# Altium PCB arduino-to-headers-shield.PcbDoc
Units mil, origin at the board's own origin, x right, y up, seen from the top; angles counter-clockwise.
Board outline 3900 x 2100 mil, 2 copper layers (Top Layer, Bottom Layer); 16 components, 30 nets, 89 pads, 2 vias.
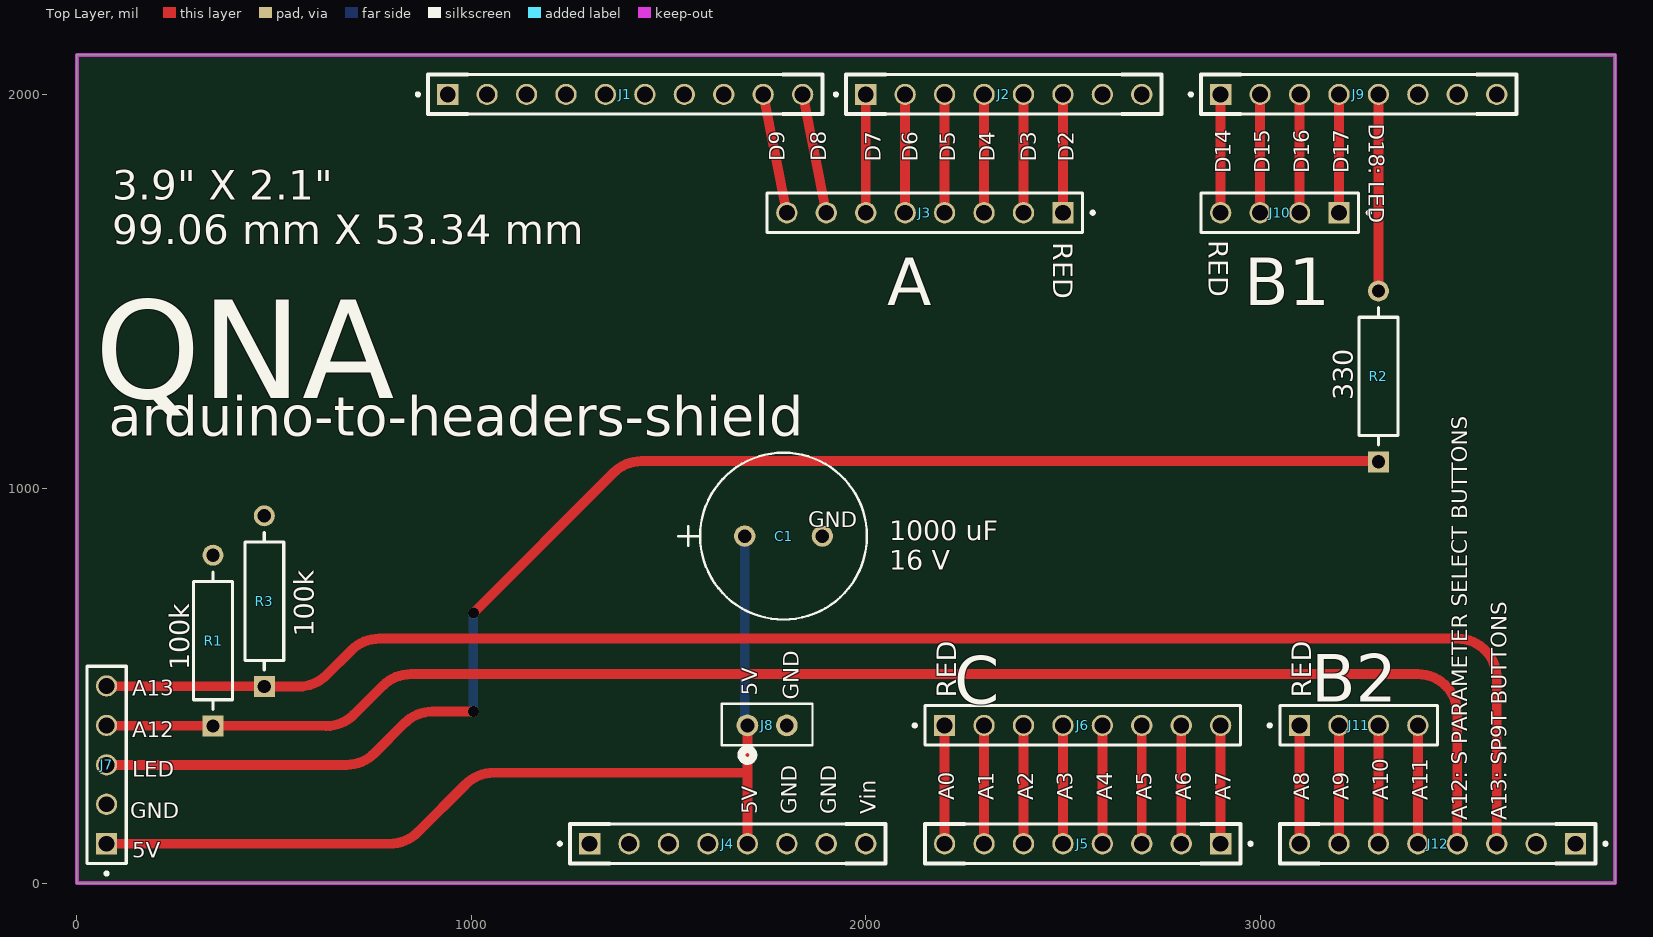
[diagram p0: Top Layer view]
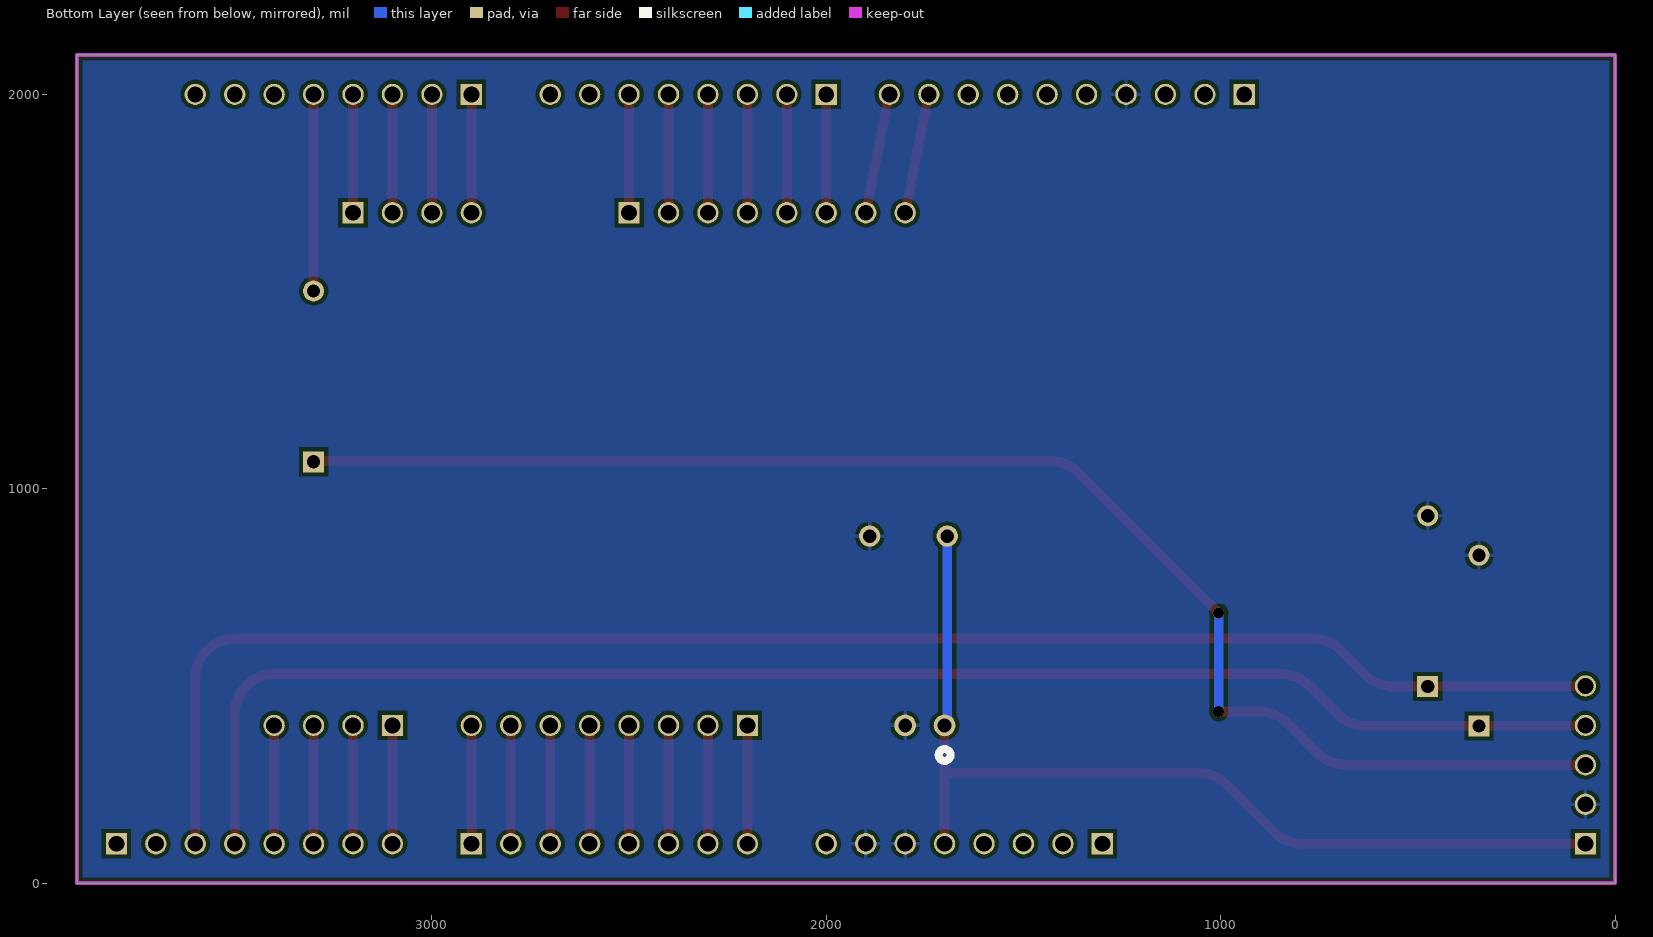
[diagram p1: Bottom Layer view, seen from below]
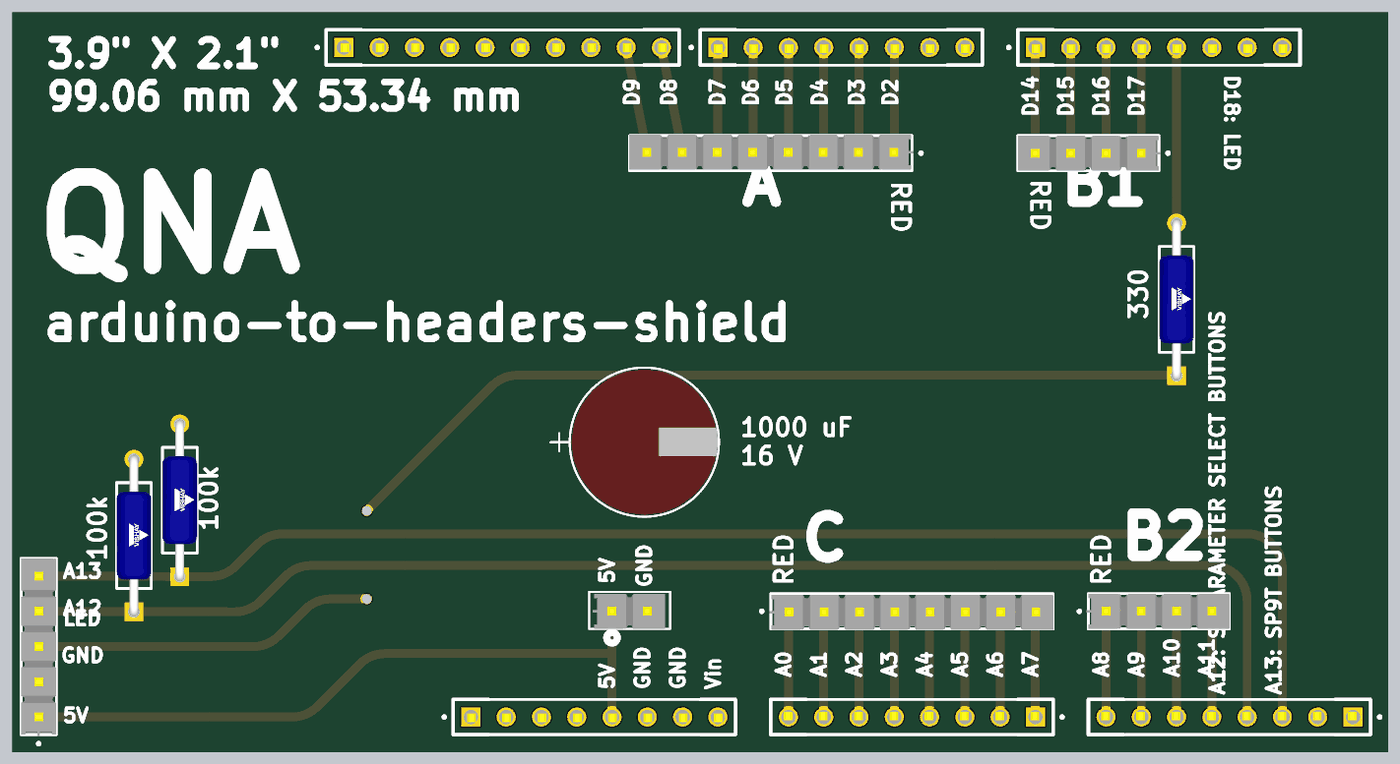
[diagram p2: 3D render of the assembled board from above, using the file's embedded part models]

## Layer stack, top to bottom
Top Solder: solder mask 0.4, Solder Resist, Dk 3.5
Top Layer: signal copper 1.4
Dielectric 1: dielectric 12.6, FR-4, Dk 4.8
Bottom Layer: signal copper 1.4
Bottom Solder: solder mask 0.4, Solder Resist, Dk 3.5

## Board outline
0,0 0,2100 3900,2100 3900,0

## Design rules (kind name [scope] priority, off if disabled: settings)
Clearance [All] p1: gap=10 ignorepadtopadclearanceinfootprint=FALSE except(0: Arc-Hole Track-Hole SMDPad-Hole THPad-Hole Via-Hole Fill-Hole Poly-Hole Region-Hole Text-Hole; 4: Arc-Arc Arc-Track Arc-SMDPad Track-Track Track-SMDPad SMDPad-SMDPad)
PolygonConnect [All] p1: connectstyle=Relief reliefconductorwidth=10 reliefentries=4 polygonreliefangle="90 Angle" airgapwidth=10
RoutingVias [All] p1: holewidth=28 width=50 viastyle="Through Hole" minholewidth=28 minwidth=50 maxholewidth=28 maxwidth=50
SolderMaskExpansion [All] p1: expansion=4 istentingtop=FALSE
Width [All] p1: maxlimit=35 minlimit=10 preferedwidth=25 minimp=50.000000 maximp=50.000000 favimp=50.000000
30 further rules are at their usual default settings.

## Components (designator, comment, footprint, x,y, rotation, side; value= is the part's Value field where it differs from the comment)
C1 "16PK1000MEFC10X12.5" CAP_PKPZ_10X12P5_LOW_RUB 1693.15,880 r0 top
J1 "TSW-110-07-G-S" SAMTEC_TSW-110-07-G-S 1390,2000 r0 top
J2 "TSW-108-07-G-S" SAMTEC_TSW-108-07-G-S 2350,2000 r0 top
J3 "TSW-108-07-G-S-topside" SAMTEC_TSW-108-07-G-S-topside 2150,1700 r180 top
J4 "TSW-108-07-G-S" SAMTEC_TSW-108-07-G-S 1650,100 r0 top
J5 "TSW-108-07-G-S" SAMTEC_TSW-108-07-G-S 2550,100 r180 top
J6 "TSW-108-07-G-S-topside" SAMTEC_TSW-108-07-G-S-topside 2550,400 r0 top
J7 "TSW-105-07-G-topside" SAMTEC_TSW-105-07-G-S-topside 75,300 r90 top
J8 "TSW-102-07-G-S" TSW-102-07-G-S-topside 1750,400 r0 top
J9 "TSW-108-07-G-S" SAMTEC_TSW-108-07-G-S 3250,2000 r0 top
J10 "TSW-104-07-G-S-topside" SAMTEC_TSW-104-07-G-S-topside 3050,1700 r180 top
J11 "TSW-104-07-G-S-topside" SAMTEC_TSW-104-07-G-S-topside 3250,400 r0 top
J12 "TSW-108-07-G-S" SAMTEC_TSW-108-07-G-S 3450,100 r180 top
R1 "100k" FP-RLR07-MFG 345,615 r90 top
R2 "330 ohm" FP-RLR07-MFG 3300,1285 r90 top
R3 "100k" FP-RLR07-MFG 475,715 r90 top

## Footprints (in the part's own frame and the unit in brackets; to place one, negate y for a bottom-side part, rotate by r counter-clockwise, add the part's x,y. Pads: shape width x height; smd on the part's side, far side on the other; paste and mask are expansions set on the pad)
CAP_PKPZ_10X12P5_LOW_RUB [mil]
  round 54 / inner round 60 / far side round 54 hole 34 paste-99999 mask+0: 1(0,0) 2(196.85,0)
  silkscreen extent -168,-212 310,212, body extent -108,-206 306,206, height 552
FP-RLR07-MFG [mm]
  rect 1.35x1.35 hole 0.85 paste-2539.97 mask+0: 1(-5.5,0)
  round 1.35 hole 0.85 paste-2539.97 mask+0: 2(5.5,0)
  silkscreen extent -4.43,-1.25 4.43,1.25, body extent -6.27,-1.35 6.27,1.35, height 0.25
SAMTEC_TSW-104-07-G-S-topside [mm]
  rect 1.37x1.37 / inner round 1.37 / far side rect 1.37x1.37 hole 1.02: 01(-3.81,0)
  round 1.37 hole 1.02: 02(-1.27,0) 03(1.27,0) 04(3.81,0)
  silkscreen extent -5.83,-1.27 5.08,1.27, body extent -5.21,-1.27 5.08,1.27, height 8.38
SAMTEC_TSW-105-07-G-S-topside [mm]
  rect 1.37x1.37 hole 1.02: 01(-5.08,0)
  round 1.37 hole 1.02: 02(-2.54,0) 03(0,0) 04(2.54,0) 05(5.08,0)
  silkscreen extent -7.1,-1.27 6.35,1.27, body extent -6.48,-1.27 6.35,1.27, height 5.9
SAMTEC_TSW-108-07-G-S [mm]
  rect 1.37x1.37 / inner round 1.37 / far side rect 1.37x1.37 hole 1.02: 01(-8.89,0)
  round 1.37 hole 1.02: 02(-6.35,0) 03(-3.81,0) 04(-1.27,0) 05(1.27,0) 06(3.81,0) 07(6.35,0) 08(8.89,0)
  silkscreen extent -10.91,-1.27 10.16,1.27, body extent -10.25,-1.34 10.2,1.2, height 1.34
SAMTEC_TSW-108-07-G-S-topside [mm]
  rect 1.37x1.37 / inner round 1.37 / far side rect 1.37x1.37 hole 1.02: 01(-8.89,0)
  round 1.37 hole 1.02: 02(-6.35,0) 03(-3.81,0) 04(-1.27,0) 05(1.27,0) 06(3.81,0) 07(6.35,0) 08(8.89,0)
  silkscreen extent -10.91,-1.27 10.16,1.27, body extent -10.25,-1.34 10.2,1.2, height 8.38
SAMTEC_TSW-110-07-G-S [mm]
  rect 1.37x1.37 / inner round 1.37 / far side rect 1.37x1.37 hole 1.02: 01(-11.43,0)
  round 1.37 hole 1.02: 02(-8.89,0) 03(-6.35,0) 04(-3.81,0) 05(-1.27,0) 06(1.27,0) 07(3.81,0) 08(6.35,0) 09(8.89,0) 10(11.43,0)
  silkscreen extent -13.45,-1.27 12.7,1.27, body extent -12.75,-1.3 12.78,1.24, height 1.34
TSW-102-07-G-S-topside [mil]
  round 55 / inner round 60 / far side round 55 hole 35 paste-99999 mask+0: 1(-50,0) 2(50,0)
  silkscreen extent -115,-90 115,55, body extent -105,-50 100,50, height 330

## Part data
C1: "No Description Available", Mfr_Name=Rubycon, Copyright="Copyright (C) 2024 Ultra Librarian. All rights reserved.", Manufacturer_Part_Number=16PK1000MEFC10X12.5, RefDes=RefDes, Type=DEV
J1 J7: Package=None, Availability=Unavailable, MF="Samtec Inc.", Price=None
  J1: MP=TSW-110-07-G-S
  J7: MP=TSW-105-07-G-S
J2 J3 J4 J5 J6 J9 J12: "TSW - Samtec 2.54mm Pin Header 10.92mm Overall Pin Length (07) - Fast Stock", Package=None, Check_prices=https://www.snapeda.com/parts/TSW-108-07-G-S/Samtec+Inc./view-part/?ref=eda, MF="Samtec Inc.", MP=TSW-108-07-G-S, SnapEDA_Link=https://www.snapeda.com/parts/TSW-108-07-G-S/Samtec+Inc./view-part/?ref=snap
J8: library part TSW-102-07-G-S-topside, "No Description Available", Mfr_Name="Samtec Inc", Copyright="Copyright (C) 2024 Ultra Librarian. All rights reserved.", Manufacturer_Part_Number=TSW-102-07-G-S, RefDes=RefDes, Type=DEV
J10 J11: "<a href=\"https://pricing.snapeda.com/parts/TSW-104-07-G-S/Samtec/view-part?ref=eda\">Check availability</a>", Package=None, Availability=Unavailable, MP=altium_native_batch, Price=None
R1 R2 R3: library part CMP-00030-39449004-1, "RLR07C1002FSB14 Fixed Resistor, Metal Film, 0.25W, 10000ohm, 250V, 1% +/-Tol, 100ppm/Cel, Through Hole Mount", Case/Package=Conformal, Max Operating Temperature=150°C, Max Power Dissipation=250mW, Min Operating Temperature=-65°C, Resistance=10kΩ, Temperature Coefficient=100ppm/°C, Tolerance=1%, Voltage Rating=250V, Composition="Metal Film", Contact Plating="Lead, Tin", Diameter=2.29mm, Failure Rate=0.001%, Features="Military, Moisture Resistant, Weldable", Lead Diameter=640µm, Lead Free="Contains Lead", Lead Length=38.1mm, Length=7.62mm, Military Standard=MIL-PRF-39017, Mount="Through Hole", NexarPartId=39449004, Number of Pins=14, Number of Terminations=2, Packaging=Bulk, Power Rating=250mW, Radiation Hardening=No, REACH SVHC=Unknown, RoHS=Non-Compliant, Schedule B="8533210090, 8533210090", Termination=Axial, Voltage Rating (DC)=250V, Width=2.29mm, Wire/Cable Diameter=50.8µm

## Via types
v1: diameter 28, hole 28, Top Layer to Bottom Layer, 2 vias

## Nets (pads, with @x,y where several pads share a name; then routed paths per layer and width w, separated by ;. In a path a pad name is that pad's centre, name@x,y a point inside that pad or via, vN(x,y) a via of type N, cw(c..) or ccw(c..) an arc to the next point about the centre after c; other vN are vias at no path point)
GND: C1.2 J1.04 J4.06 J4.07 J7.02 J8.2 R1.2 R3.2
NetC1_1: C1.1 J4.05 J7.01 J8.1 | length 2476.2
  Top Layer w25: J7.01 793.58,100 ccw(c793.58,200) 864.29,129.29 985.71,250.71 cw(c1056.42,180) 1056.42,280 1687.93,280 cw(c1687.93,262.93) 1700,275 ; J4.05 1700,275 ; J8.1 1700,275
  Bottom Layer w25: C1.1 1693.15,406.85 ccw(c1700,406.85) J8.1
NetJ1_09: J1.09 J3.08 | length 305.9
  Top Layer w25: J1.09 J3.08
NetJ1_10: J1.10 J3.07 | length 305.9
  Top Layer w25: J1.10 J3.07
NetJ2_01: J2.01 J3.06 | length 300
  Top Layer w25: J3.06 J2.01
NetJ2_02: J2.02 J3.05 | length 300
  Top Layer w25: J3.05 J2.02
NetJ2_03: J2.03 J3.04 | length 300
  Top Layer w25: J3.04 J2.03
NetJ2_04: J2.04 J3.03 | length 300
  Top Layer w25: J3.03 J2.04
NetJ2_05: J2.05 J3.02 | length 300
  Top Layer w25: J3.02 J2.05
NetJ2_06: J2.06 J3.01 | length 300
  Top Layer w25: J3.01 J2.06
NetJ5_01: J5.01 J6.08 | length 300
  Top Layer w25: J5.01 J6.08
NetJ5_02: J5.02 J6.07 | length 300
  Top Layer w25: J5.02 J6.07
NetJ5_03: J5.03 J6.06 | length 300
  Top Layer w25: J5.03 J6.06
NetJ5_04: J5.04 J6.05 | length 300
  Top Layer w25: J5.04 J6.05
NetJ5_05: J5.05 J6.04 | length 300
  Top Layer w25: J5.05 J6.04
NetJ5_06: J5.06 J6.03 | length 300
  Top Layer w25: J5.06 J6.03
NetJ5_07: J5.07 J6.02 | length 300
  Top Layer w25: J5.07 J6.02
NetJ5_08: J5.08 J6.01 | length 300
  Top Layer w25: J5.08 J6.01
NetJ7_03: J7.03 R2.1 | length 3677.5
  Top Layer w25: J7.03 683.58,300 ccw(c683.58,400) 754.29,329.29 830.71,405.71 cw(c901.42,335) 901.42,435 v1(1005,435) ; v1(1005,685) 1360.71,1040.71 cw(c1431.42,970) 1431.42,1070 R2.1@3300,1070
  Bottom Layer w25: v1(1005,435) v1(1005,685)
NetJ7_04: J7.04 J12.04 R1.1 | length 3862.1
  Top Layer w25: J7.04@78.71,398.46 cw(c78.71,403.71) J7.04 345,399.26 632.04,398.46 ccw(c632.04,498.46) 702.75,427.75 775.71,500.71 cw(c846.42,430) 846.42,530 3400,530 cw(c3400,430) 3500,430 J12.04
NetJ7_05: J7.05 J12.03 R3.1 | length 4043.8
  Top Layer w25: J7.05 474.7,498.74 475,498.74 562.04,498.46 ccw(c562.04,598.46) 632.75,527.75 695.71,590.71 cw(c766.42,520) 766.42,620 3500,620 cw(c3500,520) 3600,520 J12.03
NetJ9_01: J9.01 J10.04 | length 300
  Top Layer w25: J10.04 J9.01
NetJ9_02: J9.02 J10.03 | length 300
  Top Layer w25: J10.03 J9.02
NetJ9_03: J9.03 J10.02 | length 300
  Top Layer w25: J10.02 J9.03
NetJ9_04: J9.04 J10.01 | length 300
  Top Layer w25: J10.01 J9.04
NetJ9_05: J9.05 R2.2 | length 498.5
  Top Layer w25: R2.2 J9.05
NetJ11_01: J11.01 J12.08 | length 300
  Top Layer w25: J12.08 J11.01
NetJ11_02: J11.02 J12.07 | length 300
  Top Layer w25: J12.07 J11.02
NetJ11_03: J11.03 J12.06 | length 300
  Top Layer w25: J12.06 J11.03
NetJ11_04: J11.04 J12.05 | length 300
  Top Layer w25: J12.05 J11.04
pads on no net: J1.01 J1.02 J1.03 J1.05 J1.06 J1.07 J1.08 J2.07 J2.08 J4.01 J4.02 J4.03 J4.04 J4.08 J9.06 J9.07 J9.08 J12.01 J12.02

## Polygon pours and split planes (outlines as drawn)
GND on Bottom Layer "NONET_L-01_P-001" (solid, pour order 0): 0,0 0,2100 3900,2100 3900,0

## Keep-outs
Keep-Out Layer:
  lines w10: 0,0 0,525 0,1575 0,2100 3900,2100 3900,0 0,0

## Silkscreen, mask and mechanical layers (free items; w line width, h text height)
Top Overlay:
  lines w10: 990,1950 890,1950 890,2050 990,2050 ; 1350,50 1250,50 1250,150 1350,150 ; 1790,1950 1890,1950 1890,2050 1790,2050 ; 1950,50 2050,50 2050,150 1950,150 ; 2050,1950 1950,1950 1950,2050 2050,2050 ; 2250,50 2150,50 2150,150 2250,150 ; 2650,1950 2750,1950 2750,2050 2650,2050 ; 2850,50 2950,50 2950,150 2850,150 ; 2950,1950 2850,1950 2850,2050 2950,2050 ; 3150,50 3050,50 3050,150 3150,150 ; 3550,1950 3650,1950 3650,2050 3550,2050 ; 3750,50 3850,50 3850,150 3750,150
  text "D18: LED" at 3275,1925 h39.37 r270
  text "D9" at 1795,1830 h39.37 r90
  text "D8" at 1900,1830 h39.37 r90
  text "D7" at 2037.74,1829.33 h39.37 r90
  text "D6" at 2132.26,1829.21 h39.37 r90
  text "D5" at 2227.26,1829.21 h39.37 r90
  text "D4" at 2327.26,1829.21 h39.37 r90
  text "D3" at 2432.26,1829.21 h39.37 r90
  text "D2" at 2527.26,1829.21 h39.37 r90
  text "D14" at 2925,1800 h39.37 r90
  text "D15" at 3025,1800 h39.37 r90
  text "D16" at 3125,1800 h39.37 r90
  text "D17" at 3225,1800 h39.37 r90
  text "RED" at 2870,1630 h50 r270
  text "RED" at 2475,1625 h50 r270
  text "3.9\" X 2.1\" / 99.06 mm X 53.34 mm" at 90,1620 h75
  text "A" at 2055,1465 h120
  text "B1" at 2960,1465 h120
  text "QNA" at 45,1230 h250
  text "330" at 3235,1225 h50 r90
  text "arduino-to-headers-shield" at 80,1135 h100
  text "GND" at 1854.35,902.4 h39.37
  text "1000 uF / 16 V" at 2060,795 h50
  text "100k" at 600,625 h50 r90
  text "100k" at 285,540 h50 r90
  text "A13" at 140,475 h39.37
  text "5V" at 1725,475 h39.37 r90
  text "RED" at 2230,470 h50 r90
  text "RED" at 3130,470 h50 r90
  text "GND" at 1830,465 h39.37 r90
  text "B2" at 3130,460 h120
  text "C" at 2225,455 h120
  text "A12" at 140,370 h39.37
  text "LED" at 140,270 h39.37
  text "A0" at 2225,210 h39.37 r90
  text "A1" at 2325,210 h39.37 r90
  text "A2" at 2425,210 h39.37 r90
  text "A3" at 2525,210 h39.37 r90
  text "A4" at 2625,210 h39.37 r90
  text "A5" at 2725,210 h39.37 r90
  text "A6" at 2825,210 h39.37 r90
  text "A7" at 2925,210 h39.37 r90
  text "A8" at 3125,210 h39.37 r90
  text "A9" at 3225,210 h39.37 r90
  text "A10" at 3325,210 h39.37 r90
  text "A11" at 3425,210 h39.37 r90
  text "5V" at 1725,175 h39.37 r90
  text "GND" at 1825,175 h39.37 r90
  text "GND" at 1925,175 h39.37 r90
  text "Vin" at 2025,175 h39.37 r90
  text "GND" at 135,165 h39.37
  text "A12: S PARAMETER SELECT BUTTONS" at 3525,160 h39.37 r90
  text "A13: SP9T BUTTONS" at 3625,160 h39.37 r90
  text "5V" at 140,65 h39.37